# EAGLE board relay (EAGLE 6.5.0)
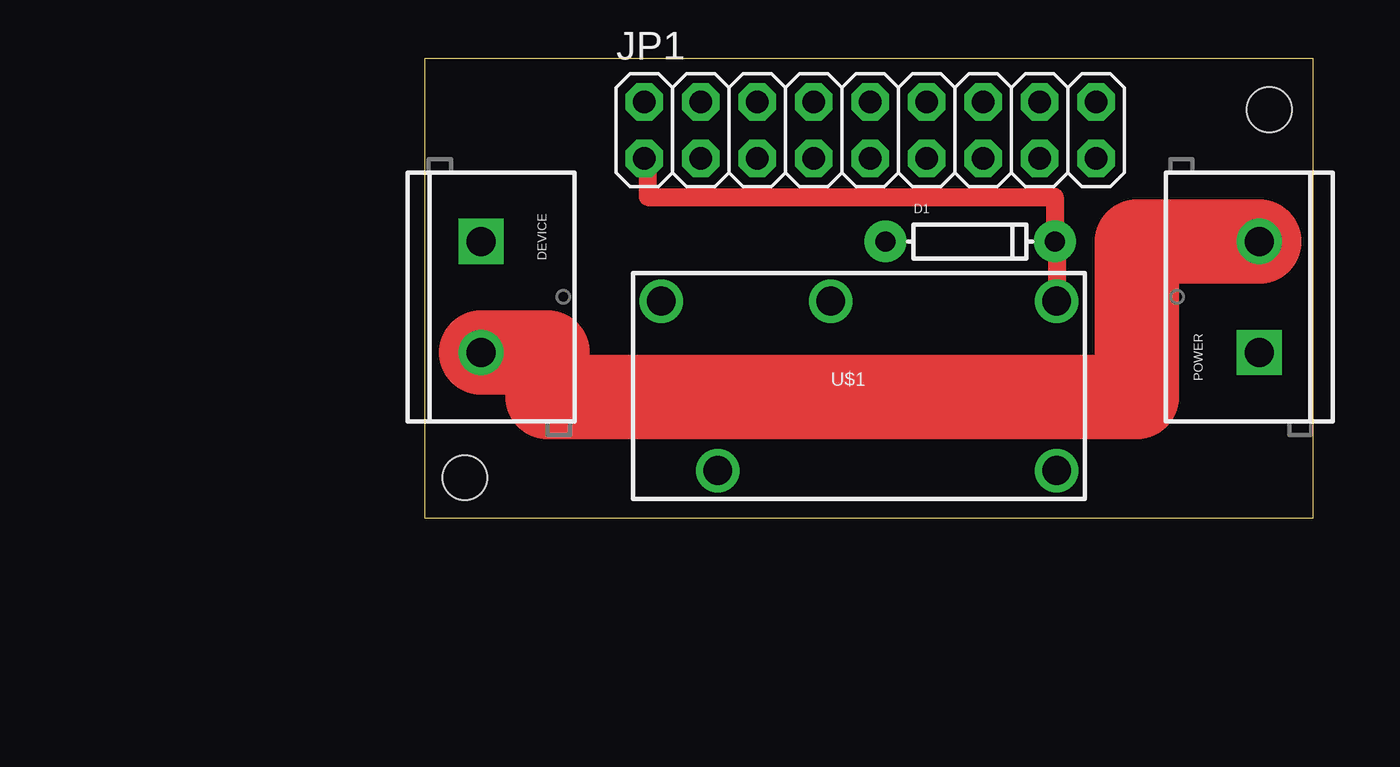
[diagram p0: board, top side]
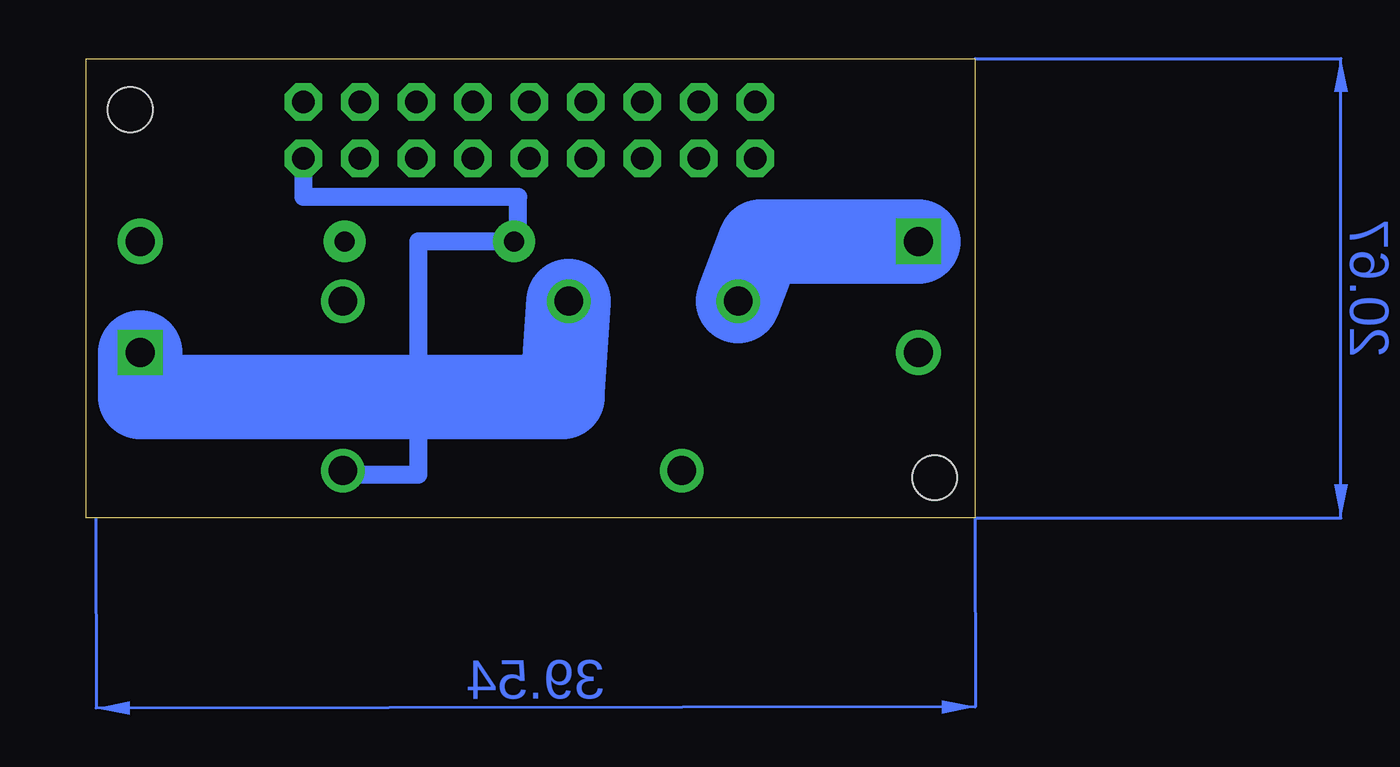
[diagram p1: board, bottom side, seen from below]

Size 39.97 x 20.67 mm. Coordinates in mm from the lower left corner, seen from the top.
Outline: 0,0 39.97,0 39.97,20.67 0,20.67 0,0
Copper layers (1*16): Top 0.035mm / dielectric 1.5mm / Bottom 0.035mm
Design rules "default *": minimum track width 24mil, minimum drill 24mil, track to track 10mil, track to pad 8mil, pad to pad 8mil, via to via 8mil, smd to smd 8mil, copper to edge 40mil, drill to drill 8mil, minimum pad ring 10mil, minimum via ring 8mil, stop-mask expansion 4mil, vias tented up to drill 0mil, thermal gap 10mil
Net classes: 0 default: width 0.152 mm, clearance 0.152 mm; 1 power: width 0.61 mm, drill 0.61 mm, clearance 0.254 mm; 2 gnd: width 0.203 mm, drill 0.559 mm, clearance 0.152 mm; 3 usbvcc: width 0.203 mm, drill 0.61 mm, clearance 0.152 mm; 4 aref: width 0.406 mm, drill 0.61 mm, clearance 0.254 mm
Holes 2 mm at 37.99,18.37 1.81,1.81

## Footprints (pad centres in the part's own frame; a part is rotated, then mirrored left to right if it is on the bottom)
DIODE-1N4148 = drill 0.9 pad 1.88: A -3.81,0; C 3.81,0
SCREWTERMINAL-5MM-2 = drill 1.3 pad 2.032 square: 1 0,0 | drill 1.3 pad 2.032: 2 5,0
2X09-BIG = drill 1.016 pad 1.676 octagon: 1 -10.16,-1.27; 2 -10.16,1.27; 3 -7.62,-1.27; 4 -7.62,1.27; 5 -5.08,-1.27; 6 -5.08,1.27; 7 -2.54,-1.27; 8 -2.54,1.27; 9 0,-1.27; 10 0,1.27; 11 2.54,-1.27; 12 2.54,1.27; 13 5.08,-1.27; 14 5.08,1.27; 15 7.62,-1.27; 16 7.62,1.27; 17 10.16,-1.27; 18 10.16,1.27
RELAY-G5Q = drill 1.3: 1 8.89,3.81; 2 -1.27,3.81; 3 -8.89,3.81; 4 -6.35,-3.81; 5 8.89,-3.81

## Placement (x,y rotation side)
D1  [DIODE-1N4148]  24.54,12.44 0 top
DEVICE  M025MM  [SCREWTERMINAL-5MM-2]  2.54,12.44 270 top
JP1  [2X09-BIG]  20.04,17.44 0 top
POWER  M025MM  [SCREWTERMINAL-5MM-2]  37.54,7.44 90 top
U$1  RELAYPTH  [RELAY-G5Q]  19.54,5.94 0 top

## Library data of the parts
D1 = SparkFun-DiscreteSemi
DEVICE POWER = SparkFun-Connectors
JP1 = adafruit
U$1 = SparkFun-Electromechanical

## Nets
N$3: D1.C JP1.1 U$1.1
N$4 [gnd]: D1.A JP1.17 U$1.5
N$7: POWER.1 U$1.2
N$8: DEVICE.1 U$1.3
N$9: DEVICE.2 POWER.2

## Tracks (layer width: path | path; a pad name or v marks a point on that pad's centre or on a via)
N$3
  Top 0.813: U$1.1 28.43,12.94 D1.C 28.35,14.44 10.04,14.44 10.04,16.17 JP1.1
N$4
  Bottom 0.813: U$1.5 28.43,1.94 25.04,1.94 25.04,12.44 D1.A 20.54,12.44 20.54,14.44 30.2,14.44 JP1.17
N$7
  Bottom 3.81: U$1.2 18.54,5.75 18.54,5.44 37.54,5.44 POWER.1
N$8
  Bottom 3.81: DEVICE.1 9.65,12.44 U$1.3
N$9
  Top 3.81: DEVICE.2 5.54,7.44 5.54,5.44 32.04,5.44 32.04,12.44 POWER.2
(copper drawn outside any net)
  shapes: Bottom area x2